# Altium PCB PCB.PcbDoc
Units mm, origin at the board's own origin, x right, y up, seen from the top; angles counter-clockwise.
Board outline 65 x 30 mm, 2 copper layers (Top Layer, Bottom Layer), stack 1.58 mm thick; 18 components, 20 nets, 147 pads, 0 vias.
Unrouted connection lines stored in the file: 56.
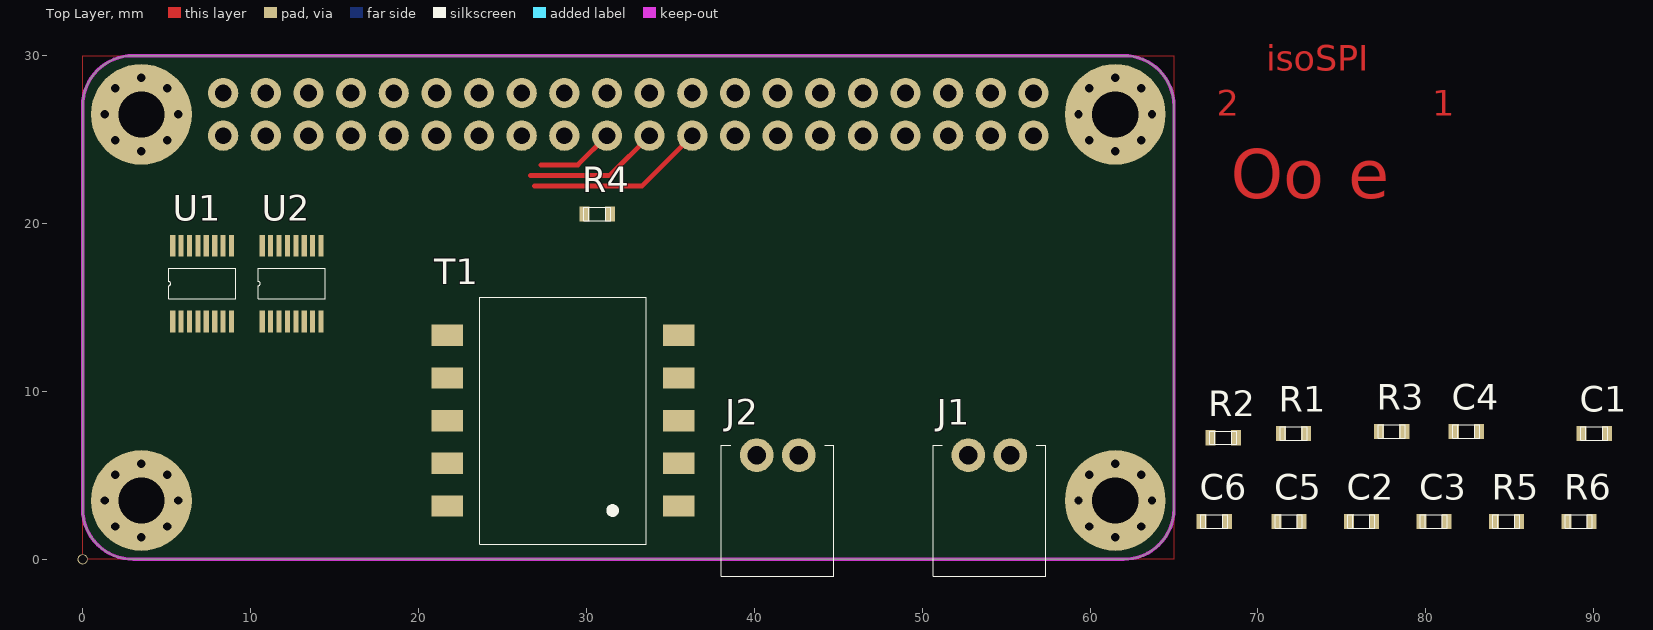
[diagram p0: Top Layer view]
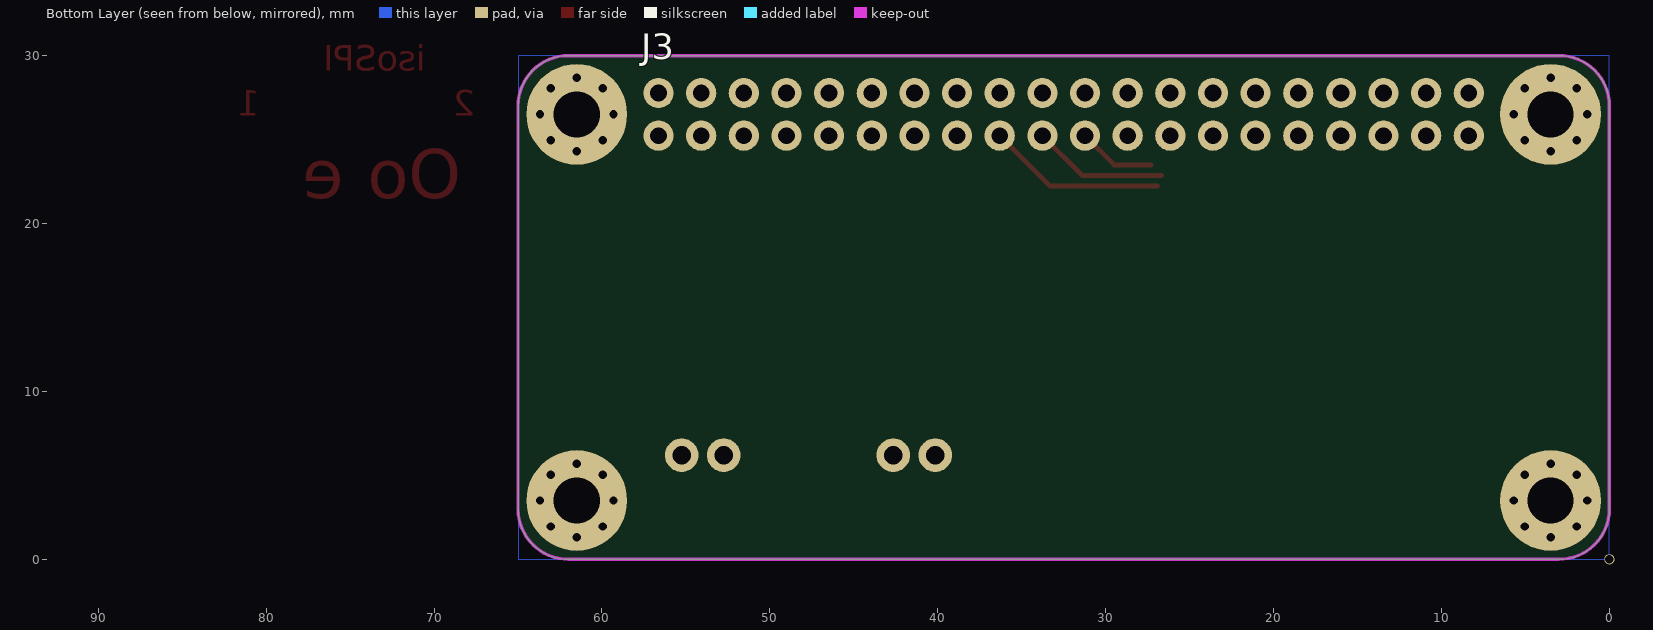
[diagram p1: Bottom Layer view, seen from below]

## Layer stack, top to bottom
Top Solder: solder mask 0.01, Solder Resist, Dk 3.5
Top Layer: signal copper 0.035
Dielectric 1: dielectric 1.51, FR-4, Dk 4.8
Bottom Layer: signal copper 0.035
Bottom Solder: solder mask 0.01, Solder Resist, Dk 3.5

## Board outline
0,3 0,27 cw(c3,27) 3,30 62,30 cw(c62,27) 65,27 65,3 cw(c62,3) 62,0 3,0 cw(c3,3)

## Design rules (kind name [scope] priority, off if disabled: settings)
Clearance [All] p1: gap=0.125 ignorepadtopadclearanceinfootprint=FALSE except(0: Arc-Hole Track-Hole SMDPad-Hole THPad-Hole Via-Hole Fill-Hole Poly-Hole Region-Hole Text-Hole)
DiffPairsRouting [All] p1: maxlimit=10 minlimit=0.125 mostfreqgap=0.15 toplayer_minwidth=0.381 toplayer_maxwidth=0.381 toplayer_prefwidth=0.381 bottomlayer_minwidth=0.381 bottomlayer_maxwidth=0.381 bottomlayer_prefwidth=0.381 maxuncoupledlength=12.7
FabricationTestPointUsage FabricationTestPointUsage_1 [All] p1: valid=0 allowmultiple=FALSE
FabricationTestpoint FabricationTestpoint_1 [All] p1: side=3 testpointundercomponent=TRUE minsize=1.016 maxsize=2.54 preferedsize=1.524 minholesize=0 maxholesize=1.016 preferedholesize=0.813 testpointgrid=0.025 allowsidetop=TRUE allowsidebottom=TRUE usegrid=TRUE gridtolerance=0
HoleSize [All] p1: absolutevalues=TRUE maxlimit=6 minlimit=0.2 maxpercent=80.000 minpercent=20.000
HoleSize FabricationTestpoint [All] p2 off: absolutevalues=TRUE maxlimit=2.54 minlimit=0.025 maxpercent=80.000 minpercent=20.000
HoleSize FabricationTestPointUsage [All] p3 off: absolutevalues=TRUE maxlimit=2.54 minlimit=0.025 maxpercent=80.000 minpercent=20.000
PlaneClearance [All] p1: clearance=0.5
PlaneConnect [All] p1: planeconnectstyle=Relief reliefexpansion=0.4 reliefentries=4 reliefconductorwidth=0.15 reliefairgap=0.15
PolygonConnect [All] p1: connectstyle=Relief reliefconductorwidth=0.15 reliefentries=4 polygonreliefangle="90 Angle" airgapwidth=0.254
RoomDefinition Schematic [InComponentClass('Schematic')] p1: confinementstyle=ConfineOut formatcopy=TRUE lockcomponents=FALSE outline 66.421,-16.002 85.471,-16.002 85.471,-4.572 66.421,-4.572
RoutingCorners [All] p1: cornerstyle=45-Degree minsetback=1.25 maxsetback=1.25
RoutingVias [All] p1: holewidth=0.3 width=0.6 viastyle="Through Hole" minholewidth=0.2 minwidth=0.45 maxholewidth=0.45 maxwidth=0.75
SolderMaskExpansion [All] p1: expansion=0.075
Width [All] p1: maxlimit=10 minlimit=0.125 preferedwidth=0.15
23 further rules are at their usual default settings.

## Components (designator, comment, footprint, x,y, rotation, side; value= is the part's Value field where it differs from the comment)
C1 "10nF" "CAP 0603" 89.281,7.493 r0 top
C2 "100nF" "CAP 0603" 75.411,2.259 r0 top
C3 "100nF" "CAP 0603" 79.729,2.259 r0 top
C4 "10nF" "CAP 0603" 81.661,7.62 r0 top
C5 "100nF" "CAP 0603" 71.093,2.259 r0 top
C6 "100nF" "CAP 0603" 66.648,2.259 r0 top
J1 "1778625" "PTSM 0.5 2 HH THT" 52.75,6.2 r0 top
J2 "1778625" "PTSM 0.5 2 HH THT" 40.15,6.2 r0 top
J3 "RPi GPIO HAT" "Pin Header 2x20 THT 2.54 Female" 8.37,27.77 r270 bottom
R1 "62R" 0603 71.374,7.493 r0 top
R2 "62R" 0603 67.183,7.239 r0 top
R3 "62R" 0603 77.216,7.62 r0 top
R4 "62R" 0603 29.9,20.574 r0 top
R5 "2k" 0603 84.047,2.259 r0 top
R6 "2k" 0603 88.365,2.259 r0 top
T1 "HM2100NL" HM2100NL 35.507,3.175 r180 top
U1 "LTC6820" MSOP-16 5.366,14.169 r90 top
U2 "LTC6820" MSOP-16 10.7,14.169 r90 top

## Footprints (in the part's own frame and the unit in brackets; to place one, negate y for a bottom-side part, rotate by r counter-clockwise, add the part's x,y. Pads: shape width x height; smd on the part's side, far side on the other; paste and mask are expansions set on the pad)
0603 [mm]
  rect 0.6x0.9 smd: 1(0,0) 2(1.5,0)
  silkscreen extent -0.05,-0.4 1.55,0.4, body extent -0.05,-0.4 1.55,0.4, height 0.43
"CAP 0603" [mm]
  rect 0.6x0.9 smd: 1(0,0) 2(1.5,0)
  silkscreen extent -0.05,-0.4 1.55,0.4, body extent -0.05,-0.41 1.55,0.41, height 0.81
HM2100NL [mm]
  rect 1.89x1.27 smd: 1(0,0) 2(0,-2.54) 3(0,-5.08) 4(0,-7.62) 5(0,-10.16) 6(13.79,-10.16) 7(13.79,-7.62) 8(13.79,-5.08) 9(13.79,-2.54) 10(13.79,0)
  silkscreen extent 1.94,-12.43 11.85,2.27, body extent -0.59,-12.43 14.38,2.27, height 3.22
MSOP-16 [mm]
  rect 1.3x0.305 smd: 1(0,0) 2(0,-0.5) 3(0,-1) 4(0,-1.5) 5(0,-2) 6(0,-2.5) 7(0,-3) 8(0,-3.5) 9(4.5,-3.5) 10(4.5,-3) 11(4.5,-2.5) 12(4.5,-2) 13(4.5,-1.5) 14(4.5,-1) 15(4.5,-0.5) 16(4.5,0)
  silkscreen extent 1.33,-3.75 3.17,0.25, body extent -0.2,-3.77 4.7,0.27, height 0.85
"Pin Header 2x20 THT 2.54 Female" [mm]
  round 1.8 hole 1: 1(0,0) 2(2.54,0) 3(0,-2.54) 4(2.54,-2.54) 5(0,-5.08) 6(2.54,-5.08) 7(0,-7.62) 8(2.54,-7.62) 9(0,-10.16) 10(2.54,-10.16) 11(0,-12.7) 12(2.54,-12.7) 13(0,-15.24) 14(2.54,-15.24) 15(0,-17.78) 16(2.54,-17.78) 17(0,-20.32) 18(2.54,-20.32) 19(0,-22.86) 20(2.54,-22.86) 21(0,-25.4) 22(2.54,-25.4) 23(0,-27.94) 24(2.54,-27.94) 25(0,-30.48) 26(2.54,-30.48) 27(0,-33.02) 28(2.54,-33.02) 29(0,-35.56) 30(2.54,-35.56) 31(0,-38.1) 32(2.54,-38.1) 33(0,-40.64) 34(2.54,-40.64) 35(0,-43.18) 36(2.54,-43.18) 37(0,-45.72) 38(2.54,-45.72) 39(0,-48.26) 40(2.54,-48.26)
  body extent -1.27,-49.53 3.81,1.27, height 8.4
"PTSM 0.5 2 HH THT" [mm]
  round 2 hole 1.1: 1(0,0) 2(2.5,0)
  silkscreen extent -2.1,-7.2 4.6,0.6, body extent -2.1,-7.2 4.6,0.6, height 5

## Part data
C1 C4: library part 4, Package=0603, ID=4, Mounting=SMT
C2 C3 C5 C6: library part 5, Package=0603, ID=5, Mounting=SMT
J1 J2: library part 3, "2 Pin Connector", Supplier Part Number 1=148-41-887, Desc="2 Pin Connector", Designation=1778625, ID=3, Supplier 1=Distrelec
J3: library part 6, "40 Pin Female Header", Descr="40 Pin Female Header", Designation="RPi GPIO HAT", ID=6
R1 R2 R3 R4: library part 238, Package=0603, Power Rating=0.1W, Tolerance=1%, ID=238, Mounting=SMD, Type=Chip
R5 R6: library part 274, Package=0603, Power Rating=0.1W, Tolerance=1%, ID=274, Mounting=SMD, Type=Chip
T1: library part 3, "BMS Communication Transformer with Choke", Primary Inductance=300uH, Supplier Part Number 1=1840-1032-1-ND, Tolerance=50%, ComponentLink1Description=Datasheet, ComponentLink1URL=https://productfinder.pulseeng.com/doc_type/WEB301/doc_num/HM2100NL/doc_part/HM2100NL.pdf, DCR Primary=850m, DCR Secondary=450m, Designation=HM2100NL, Device Height=3.45mm, ID=3, Insulation=4.3kV, Mounting=SMT, Supplier 1=Digi-Key, Turns Ratio=1:1
U1 U2: library part 1, "Isolated SPI Communications Interface", Package=MSOP-16, Supplier Part Number 1=LTC6820HMS#TRPBFCT-ND, ComponentLink1Description=Datasheet, ComponentLink1URL=https://www.analog.com/media/en/technical-documentation/data-sheets/6820fb.pdf, Designation=LTC6820, ID=1, Mounting=SMT, Supplier 1=Digi-Key

## Free pads (board coordinates)
  round 6 hole 2.75: 1(3.5,3.5) 1(3.5,26.5) 1(61.5,3.5) 1(61.5,26.5)
  round 0.6 hole 0.5: 2(5.687,3.5) 2(5.687,26.5) 2(63.687,3.5) 2(63.687,26.5) 3(5.046,5.046) 3(5.046,28.046) 3(63.046,5.046) 3(63.046,28.046) 4(3.5,5.687) 4(3.5,28.687) 4(61.5,5.687) 4(61.5,28.687) 5(1.954,5.046) 5(1.954,28.046) 5(59.954,5.046) 5(59.954,28.046) 6(1.313,3.5) 6(1.313,26.5) 6(59.313,3.5) 6(59.313,26.5) 7(1.954,1.954) 7(1.954,24.954) 7(59.954,1.954) 7(59.954,24.954) 8(3.5,1.313) 8(3.5,24.313) 8(61.5,1.313) 8(61.5,24.313) 9(5.046,1.954) 9(5.046,24.954) 9(63.046,1.954) 9(63.046,24.954) 11(0,0)

## Nets (pads, with @x,y where several pads share a name; then routed paths per layer and width w, separated by ;. In a path a pad name is that pad's centre, name@x,y a point inside that pad or via, vN(x,y) a via of type N, cw(c..) or ccw(c..) an arc to the next point about the centre after c; other vN are vias at no path point)
3V3: C2.2 C3.2 C5.2 C6.2 J3.2 J3.18 R5.2 R6.2 U1.6 U1.9 U1.12 U2.6 U2.9 U2.12
5V: J3.1 J3.3
C\E\0\: J3.23 U1.5 U2.5
C\E\1\: J3.25
GND: C1.1 C2.1 C3.1 C4.1 C5.1 C6.1 J3.5 J3.10 J3.13 J3.19 J3.26 J3.29 J3.33 J3.40 U1.1 U1.7 U1.8 U1.13 U1.14 U2.1 U2.7 U2.8 U2.13 U2.14
ID_SC: J3.27
ID_SD: J3.28
MISO: J3.22 R6.1 U1.3 U2.3 | length 8.1
  Top Layer w0.3: 26.67,22.86 31.4,22.86 J3.22
MOSI: J3.20 R5.1 U1.2 U2.2 | length 4.6
  Top Layer w0.3: 27.305,23.495 29.495,23.495 J3.20
NetC1_2: C1.2 R1.1 R2.2
NetC4_2: C4.2 R3.1 R4.2
NetJ1_1: J1.1 T1.2
NetJ1_2: J1.2 T1.1
NetJ2_1: J2.1 T1.4
NetJ2_2: J2.2 T1.5
NetR1_2: R1.2 T1.9 U1.11
NetR2_1: R2.1 T1.10 U1.10
NetR3_2: R3.2 T1.6 U2.11
NetR4_1: R4.1 T1.7 U2.10
SCLK: J3.24 U1.4 U2.4 | length 10.6
  Top Layer w0.3: 26.924,22.225 33.305,22.225 J3.24
pads on no net: J3.4 J3.6 J3.7 J3.8 J3.9 J3.11 J3.12 J3.14 J3.15 J3.16 J3.17 J3.21 J3.30 J3.31 J3.32 J3.34 J3.35 J3.36 J3.37 J3.38 J3.39 T1.3 T1.8 U1.15 U1.16 U2.15 U2.16

## Polygon pours and split planes (outlines as drawn)
no net on Bottom Layer "GND" (solid, shelved, pour order 6): 0,0 0,30 65,30 65,0
3V3 on Top Layer "3V3" (solid, shelved, pour order 4): 0,0 0,30 65,30 65,0

## Keep-outs
Keep-Out Layer:
  the board outline again, w0.2

## Other copper
Top Layer:
  text "isoSPI" at 70.485,29.083 h1.52
  text "2" at 67.537,26.416 h1.52
  text "1" at 80.391,26.416 h1.52
  text "Oo" at 68.367,20.556 h5
  text "e" at 75.367,20.556 h5

## Silkscreen, mask and mechanical layers (free items; w line width, h text height)
Top Solder:
  text "isoSPI" at 70.485,29.083 h1.52
  text "2" at 67.537,26.416 h1.52
  text "1" at 80.391,26.416 h1.52
  text "Oo" at 68.367,20.556 h5
  text "e" at 75.367,20.556 h5